# Altium PCB PCB_Drohne.PcbDoc
Units mil, origin at the board's own origin, x right, y up, seen from the top; angles counter-clockwise.
Board outline 5688.98 x 1811.02 mil, 2 copper layers (Top Layer, Bottom Layer); 20 components, 23 nets, 121 pads, 8 vias.
Unrouted connection lines stored in the file: 2.
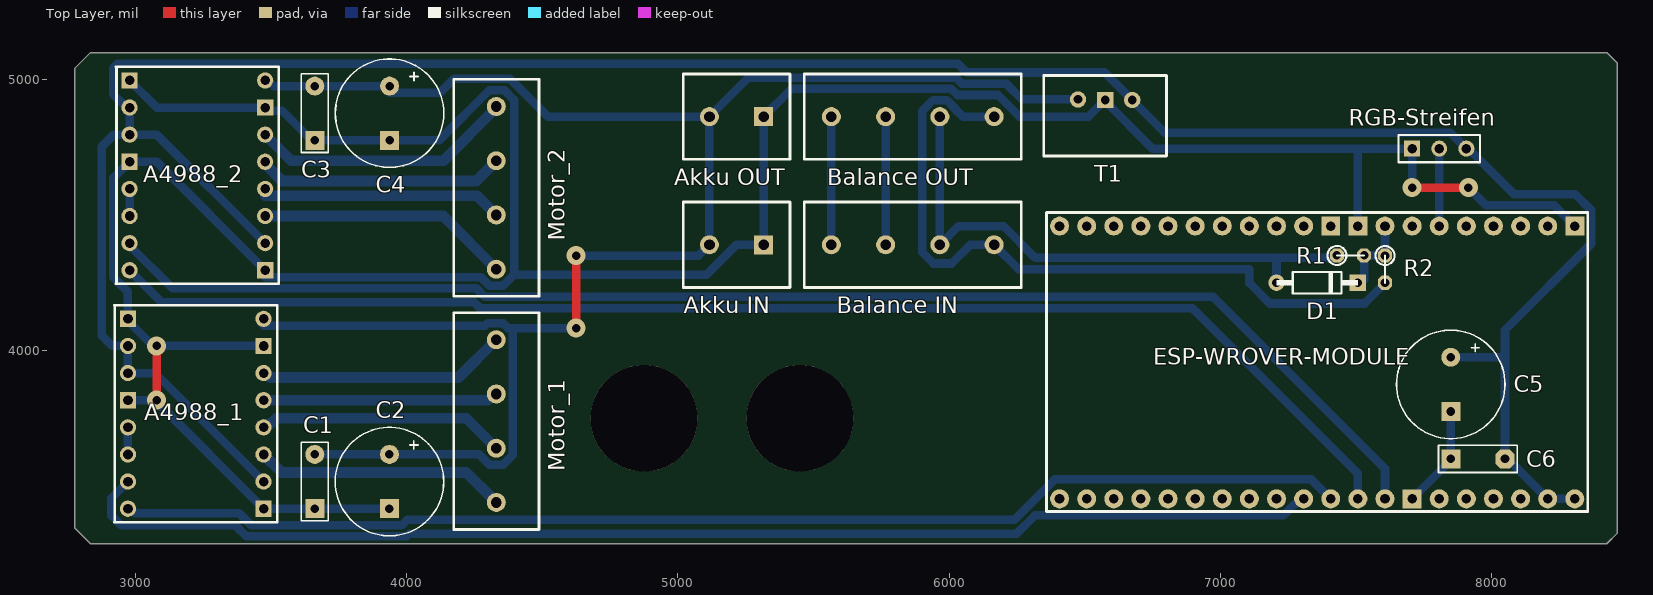
[diagram p0: Top Layer view]
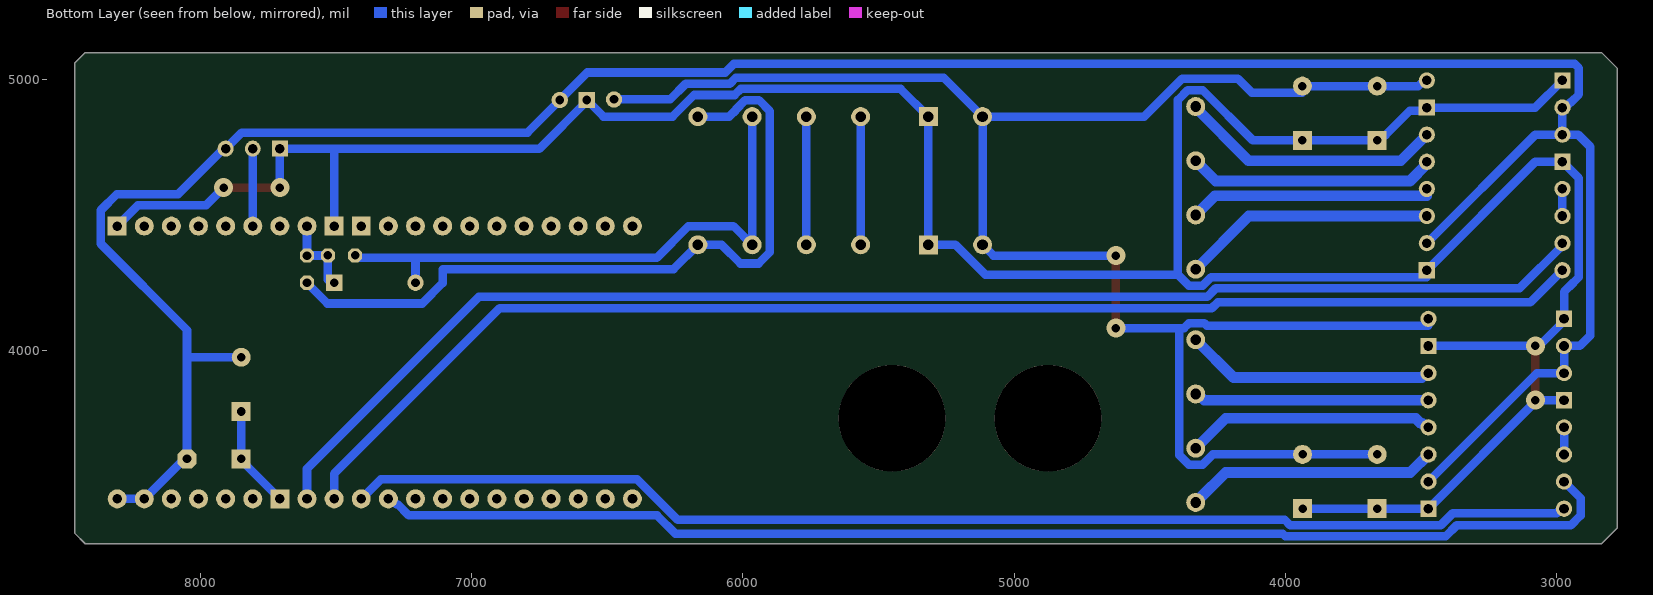
[diagram p1: Bottom Layer view, seen from below]
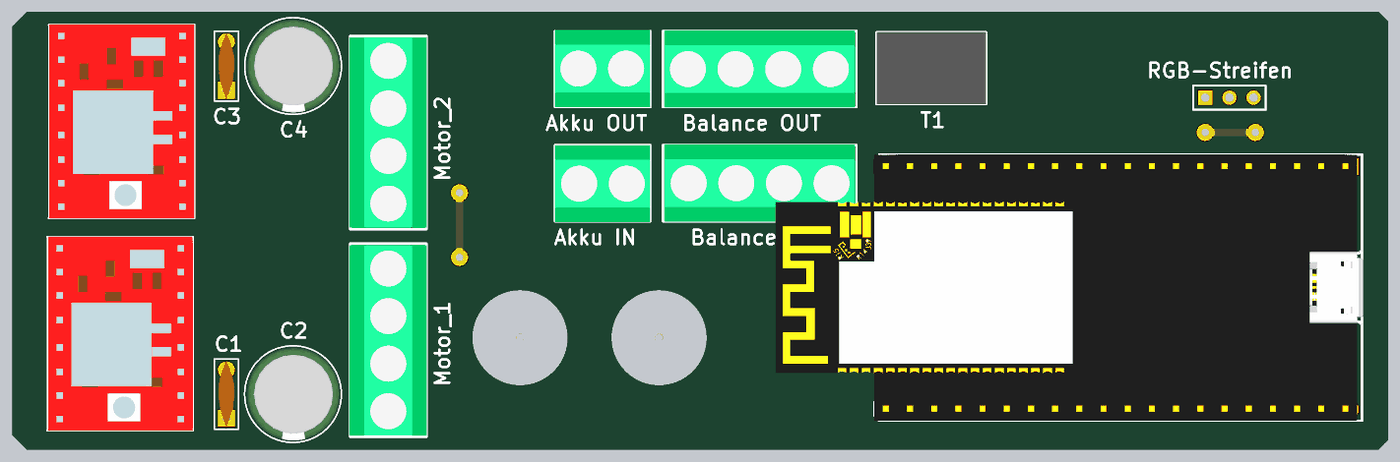
[diagram p2: 3D render of the assembled board from above, using the file's embedded part models]

## Layer stack, top to bottom
Top Solder: solder mask 0.4, Solder Resist, Dk 3.5
Top Layer: signal copper 1.4
Dielectric1: dielectric 12.6, FR-4, Dk 4.8
Bottom Layer: signal copper 1.4
Bottom Solder: solder mask 0.4, Solder Resist, Dk 3.5

## Board outline
2834.65,3287.4 2775.59,3346.46 2775.59,5039.37 2834.65,5098.43 8425.2,5098.43 8464.57,5059.06 8464.57,3326.77 8425.2,3287.4

## Design rules (kind name [scope] priority, off if disabled: settings)
Clearance "Text (Polygon)" [inPolygon vs isText] p1: gap=0 ignorepadtopadclearanceinfootprint=FALSE
Clearance "Masseflaeche (Polygon)" [All vs inPolygon] p2: gap=20 ignorepadtopadclearanceinfootprint=FALSE except(0: Arc-Hole Track-Hole SMDPad-Hole THPad-Hole Via-Hole Fill-Hole Poly-Hole Region-Hole Text-Hole)
Clearance "Abstand (Clearance)" [All] p3: gap=10 ignorepadtopadclearanceinfootprint=FALSE except(0: Arc-Hole Track-Hole SMDPad-Hole THPad-Hole Via-Hole Fill-Hole Poly-Hole Region-Hole Text-Hole)
DiffPairsRouting [All] p1: maxlimit=15 minlimit=12 mostfreqgap=12 toplayer_minwidth=15 toplayer_maxwidth=15 toplayer_prefwidth=15 bottomlayer_minwidth=15 bottomlayer_maxwidth=15 bottomlayer_prefwidth=15 maxuncoupledlength=500
FabricationTestPointUsage TestPointUsage [All] p1: valid=0 allowmultiple=FALSE
FabricationTestpoint Testpoint [All] p1: side=3 testpointundercomponent=TRUE minsize=40 maxsize=100 preferedsize=60 minholesize=0 maxholesize=40 preferedholesize=32 testpointgrid=1 allowsidetop=TRUE allowsidebottom=TRUE usegrid=TRUE gridtolerance=0.01
HoleSize [All] p1: absolutevalues=TRUE maxlimit=100 minlimit=28 maxpercent=80.000 minpercent=20.000
HoleToHoleClearance [All] p1: gap=10 allowstackedmicrovias=FALSE
PlaneConnect [All] p1: planeconnectstyle=Relief reliefexpansion=20 reliefentries=4 reliefconductorwidth=32 reliefairgap=10
PolygonConnect [All] p1: connectstyle=Relief reliefconductorwidth=32 reliefentries=4 polygonreliefangle="90 Angle" airgapwidth=10
RoomDefinition Schematic_Drohne [InComponentClass('Schematic_Drohne')] p1: confinementstyle=ConfineIn formatcopy=TRUE lockcomponents=FALSE outline -200,-200 1800,-200 1800,800 -200,800
RoutingVias [All] p1: holewidth=28 width=50 viastyle="Through Hole" minholewidth=28 minwidth=50 maxholewidth=28 maxwidth=50
SMDEntry [All] p1: side=TRUE corner=TRUE anyangle=FALSE
SilkToSilkClearance [All] p1 off: silktosilkclearance=10
SilkToSolderMaskClearance SilkscreenOverComponentPads [IsPad] p1 off: minsilkscreentomaskgap=10 clearancetoexposedcopper=TRUE
SolderMaskExpansion [All] p1: expansion=4 istentingtop=FALSE
UnRoutedNet [All] p1: checkbadconnections=TRUE
Width [All] p1: maxlimit=200 minlimit=11 preferedwidth=31.5 minimp=50.000000 maximp=50.000000 favimp=50.000000
21 further rules are at their usual default settings.

## Classes and differential pairs
component class Schematic_Drohne: * A4988_1 A4988_2 "Balance IN" "Balance OUT" C1 C2 C3 C4 C5 C6 D1 Motor_1 Motor_2 R1 R2 RGB-Streifen T1

## Components (designator, comment, footprint, x,y, rotation, side; value= is the part's Value field where it differs from the comment)
A4988_1 "Stepper_Driver" A4988 3222.44,3766.54 r0 top
A4988_2 "Stepper_Driver" A4988 3228.35,4645.67 r0 top
"Akku IN" "Schraubklemme" Schraubklemme_1x2#1 5216.53,4389.76 r270 top (schematic designator Akku)
"Akku OUT" "Schraubklemme" Schraubklemme_1x2#2 5216.53,4862.2 r90 top (schematic designator Ladestecker)
"Balance IN" "Schraubklemme 1x4" CTB0502-4 5866.14,4389.76 r270 top
"Balance OUT" "Schraubklemme 1x4" CTB0502-4 5866.14,4862.2 r90 top
C1 "100nF" "C_RM2-025X075 - with Ceramic Disc Capacitor"#1 3661.42,3416.54 r90 top
C2 "100uF" "C_POL_RM2-10,5 x 12.5mm" 3936.71,3616.54 r270 top
C3 "100nF" "C_RM2-025X075 - with Ceramic Disc Capacitor"#1 3661.42,4775 r90 top
C4 "100uF" "C_POL_RM2-10,5 x 12.5mm" 3937.01,4975 r270 top
C5 "100uF" "C_POL_RM2-10,5 x 12.5mm" 7850,3975 r270 top
C6 "100nF" "C_RM2-025X075 - with Ceramic Disc Capacitor"#2 8050,3600 r180 top
D1 "BZX55C3V3" D_DO35-RM3 7207.48,4249.84 r0 top
ESP "ESP_WROVER_DEVKIT" ESP_WROVER_DEVKIT 7479.92,3957.68 r90 top
Motor_1 "Schraubklemme 1x4" CTB0502-4 4330.71,3739.57 r0 top
Motor_2 "Schraubklemme 1x4" CTB0502-4 4330.71,4599.51 r0 top
R1 "5.6K" "R_0204V/RM1 - 1k" 7480.31,4350.39 r0 top
R2 "2.2K" "R_0204V/RM1 - 1k" 7607.48,4299.84 r270 top
RGB-Streifen "" HDR1X3 7707.48,4744.09 r0 top
T1 "TSR_converter" PCBComponent_1 6575.51,4866.46 r0 top

## Footprints (in the part's own frame and the unit in brackets; to place one, negate y for a bottom-side part, rotate by r counter-clockwise, add the part's x,y. Pads: shape width x height; smd on the part's side, far side on the other; paste and mask are expansions set on the pad)
A4988 [mil]
  rect 60x60 hole 35.43: 1(-250,350) 4(-250,50) 10(250,250) 16(250,-350)
  round 60 hole 35.43: 2(-250,250) 3(-250,150) 5(-250,-50) 6(-250,-150) 7(-250,-250) 8(-250,-350) 9(250,350) 11(250,150) 12(250,50) 13(250,-50) 14(250,-150) 15(250,-250)
  round 60 on Top Overlay: Poti(2.36,-250)
  silkscreen extent -300,-400 300,400, body extent -298,-403 300,403, height 618
"C_POL_RM2-10,5 x 12.5mm" [mil] "RM2, diameter 10.5 mm, height 12.5mm"
  round 70 hole 31.5: 1(0,0)
  rect 70x70 hole 31.5: 2(200,0)
  silkscreen extent -100,-200 300,200, body extent -92,-190 292,194, height 491
"C_RM2-025X075 - with Ceramic Disc Capacitor"#1 [mil] "RM2, outline 2.5 x 7.5 mm"
  rect 70x70 hole 31.5: 1(0,0)
  round 70 hole 31.5: 2(200,0)
  silkscreen extent -45,-50 245,50, body extent -37,-33 238,33, height 278
"C_RM2-025X075 - with Ceramic Disc Capacitor"#2 [mil] "RM2, outline 2.5 x 7.5 mm"
  oct 70x70 hole 31.5: 1(0,0)
  rect 70x70 hole 31.5: 2(200,0)
  silkscreen extent -45,-50 245,50, body extent -37,-33 238,33, height 278
CTB0502-4 [mil]
  round 70 hole 39.37 mask+4: 1(0,300) 2(0,100) 3(0,-100) 4(0,-300)
  silkscreen extent -157,-400 157,400, body extent -159,-394 159,394, height 394
D_DO35-RM3 [mil] "DO35-7, diameter 2 mm, horizontal, grid 7.62 mm"
  round 60 hole 31.5: A(0,0)
  rect 60x60 hole 31.5: C(300,0)
  silkscreen extent 0,-40 300,40, body extent -10,-38 310,38, height 77
ESP_WROVER_DEVKIT [mm]
  round 1.778 hole 0.9: 1(-12.825,27.24) 2(-12.825,24.7) 3(-12.825,22.16) 4(-12.825,19.62) 5(-12.825,17.08) 6(-12.825,14.54) 7(-12.825,12) 8(-12.825,9.46) 9(-12.825,6.92) 10(-12.825,4.38) 11(-12.825,1.84) 12(-12.825,-0.7) 13(-12.825,-3.24) 15(-12.825,-8.32) 16(-12.825,-10.86) 17(-12.825,-13.4) 18(-12.825,-15.94) 19(-12.825,-18.48) 20(-12.825,-21.02) 21(12.725,27.24) 22(12.725,24.7) 23(12.725,22.16) 24(12.725,19.62) 25(12.725,17.08) 26(12.725,14.54) 27(12.725,12) 28(12.725,9.46) 29(12.725,6.92) 30(12.725,4.38) 33(12.725,-3.24) 34(12.725,-5.78) 35(12.725,-8.32) 36(12.725,-10.86) 37(12.725,-13.4) 38(12.725,-15.94) 39(12.725,-18.48)
  rect 1.778x1.778 hole 0.9: 14(-12.825,-5.78) 31(12.725,1.84) 32(12.725,-0.7) 40(12.725,-21.02)
  silkscreen extent -14,-22.24 14,28.46, body extent -14.02,-22.35 14.02,39.35, height 17.97
HDR1X3 [mm] "Connector; Header; 3 Position"
  rect 1.5x1.5 hole 0.9: 1(0,0)
  round 1.5 hole 0.9: 2(2.54,0) 3(5.08,0)
  silkscreen extent -1.27,-1.27 6.35,1.27
PCBComponent_1 [mil]
  round 60 hole 31.5: 1(-100,59) 3(100,57.09)
  rect 60x60 hole 31.5: 2(0,57.09)
  round 60 on Top Overlay: ""(-100,-50)
  silkscreen extent -226,-150 226,148, body extent -226,-149 226,149, height 400
"R_0204V/RM1 - 1k" [mil] "type 0204, RM 1, 1k"
  oct 52x52 hole 31.5: 1(-50,0) 2(50,0)
  silkscreen extent -85,-35 50,35, body extent -86,-36 60,36, height 267
Schraubklemme_1x2#1 [mil]
  rect 70x70 hole 39.37 mask+4: 1(0,100)
  round 70 hole 39.37 mask+4: 2(0,-100)
  silkscreen extent -157,-197 157,197, body extent -157,-197 161,197, height 394
Schraubklemme_1x2#2 [mil]
  round 70 hole 39.37 mask+4: 1(0,100)
  rect 70x70 hole 39.37 mask+4: 2(0,-100)
  silkscreen extent -157,-197 157,197, body extent -157,-197 161,197, height 394

## Part data
"Akku IN" "Akku OUT": library part Schraubklemme_1x2
C1 C3 C6: library part C, "Capacitor", Rated Voltage=50V, LatestRevisionDate=07-Sep-2019, Published=21-Feb-2011, Usage="only permitted for non-commercial purposes at HTL I Innsbruck"
C2 C4 C5: library part C_POL, "Polarized Capacitor", Rated Voltage=63V, LatestRevisionDate=07-Sep-2019, Published=21-Feb-2011, Usage="only permitted for non-commercial purposes at HTL I Innsbruck"
D1: "Zener Diode 3.3V, 500mW (Silicon Epitaxial Planar)", LatestRevisionDate=01-Nov-2012, Published=04-Jun-2011, Publisher="Michael Kupfner", SimulationModellSource="Vishay Telefunken Discrete Diode", Usage="only permitted for non-commercial purposes at HTL I Innsbruck"
R1 R2: library part R, "Resistor", LatestRevisionDate=07-Sep-2019, Published=21-Feb-2011, Usage="only permitted for non-commercial purposes at HTL I Innsbruck"
RGB-Streifen: library part "Header 3", "Header, 3-Pin", LatestRevisionDate=17-Jul-2002, LatestRevisionNote="Re-released for DXP Platform.", Publisher="Altium Limited"
T1: library part TSR-0-5-2450

## Free pads (board coordinates)
  round 393.7 hole 393.7 unplated mask+0: Loch(4875,3750) Loch(5450,3750)

## Via types
v1: diameter 70, hole 31.5, Top Layer to Bottom Layer, 8 vias

## Nets (pads, with @x,y where several pads share a name; then routed paths per layer and width w, separated by ;. In a path a pad name is that pad's centre, name@x,y a point inside that pad or via, vN(x,y) a via of type N, cw(c..) or ccw(c..) an arc to the next point about the centre after c; other vN are vias at no path point)
"ESP Pin 2": ESP.35 RGB-Streifen.2 | length 285.4
  Bottom Layer w31.5: ESP.35 RGB-Streifen.2
"ESP Pin 4": D1.C ESP.33 R1.2 R2.1 | length 303.6
  Bottom Layer w31.5: D1.C 7520.06,4249.84 7530.31,4260.09 R1.2 7530.59,4350.12 7607.2,4350.12 R2.1 ESP.33
"ESP Pin 12": A4988_2.7 ESP.13 | length 5089.5
  Bottom Layer w31.5: A4988_2.7 2978.35,4387.6 3136.77,4229.17 4256.45,4229.17 4288.36,4197.26 6974,4197.26 7607.48,3563.78 ESP.13
"ESP Pin 14": A4988_2.8 ESP.12 | length 4932.7
  Bottom Layer w31.5: A4988_2.8 3096.73,4177.28 4249.65,4177.28 4271.17,4155.77 6897.38,4155.77 7507.48,3545.67 ESP.12
"ESP Pin 26": A4988_1.7 ESP.10 | length 4635.4
  Bottom Layer w31.5: A4988_1.7 2911.69,3455.79 2911.69,3391.37 2947.28,3355.79 3368.09,3355.79 3409.59,3314.29 3999.57,3314.29 4010.27,3325 6250,3325 6317.01,3392.01 7232.64,3392.01 7274.14,3433.5 7277.81,3433.5 7297.06,3452.76 ESP.10
"ESP Pin 27": A4988_1.8 ESP.11 | length 4560.2
  Bottom Layer w31.5: A4988_1.8 2982.86,3416.54 2999.4,3400 3382.56,3400 3426.78,3355.79 3982.38,3355.79 4001.59,3375 6240.35,3375 6390.35,3525 7335.24,3525 ESP.11
GND: "Akku IN.1" "Akku OUT.2" A4988_1.1 A4988_1.4 A4988_1.10 A4988_1.16 A4988_2.1 A4988_2.4 A4988_2.10 A4988_2.16 C1.1 C2.2 C3.1 C4.2 C5.2 C6.2 ESP.14 ESP.31 ESP.32 ESP.40 RGB-Streifen.1 T1.2 | length 11812.6
  Top Layer w31.5: v1(3078.35,3816.54) v1(3078.35,4016.54) ; v1(7707.48,4600) v1(7914.94,4600)
  Bottom Layer w31.5: A4988_1.4 v1(3078.35,3816.54) 3078.35,3810.63 A4988_1.16 C1.1 C2.2 ; A4988_2.1 3078.35,4895.67 A4988_2.10 3489.76,4884.25 3540.75,4884.25 3630.75,4794.25 3642.17,4794.25 C3.1 C4.2 4120.29,4775 4305.55,4960.26 4359.76,4960.26 4396.46,4923.56 4396.46,4279.35 ; A4988_1.10 v1(3078.35,4016.54) 3070.98,4023.9 3057.36,4023.9 2972.44,4108.82 A4988_1.1 2972.44,4216.47 2953.99,4234.92 2953.18,4234.92 2917.6,4270.51 2917.6,4634.92 A4988_2.4 3078.35,4695.67 A4988_2.16 ; A4988_2.16@3478.35,4270.67 4273.64,4270.67 4305.55,4238.76 4355.87,4238.76 4396.46,4279.35 ; ESP.32 7507.48,4741.73 7509.84,4744.09 ; ESP.14 7830.75,3576.02 7830.75,3580.75 C6.2 C5.2@7850,3750 ; v1(7707.48,4600) 7707.48,4725.64 7689.03,4744.09 7509.84,4744.09 ; v1(7914.94,4600) 7979.66,4535.28 8230.87,4535.28 ESP.40 ; 4396.46,4279.35 5106.12,4279.35 5216.54,4389.76 5316.53,4389.76 5316.53,4862.2 5418.78,4964.45 6008.49,4964.45 6030.93,4942.01 6180.04,4942.01 6259.84,4862.2 6514.17,4862.2 6573.23,4921.26 6750.39,4744.09 7509.84,4744.09
NetA4988_1_5: A4988_1.5 A4988_1.6 | length 100
  Bottom Layer w31.5: A4988_1.6 A4988_1.5
NetA4988_1_11: A4988_1.11 Motor_1.1 | length 922.9
  Bottom Layer w39.37: A4988_1.11 3480.73,3916.54 3497.26,3900 4191.14,3900 Motor_1.1
NetA4988_1_12: A4988_1.12 Motor_1.2 | length 845.2
  Bottom Layer w39.37: A4988_1.12@3495.01,3816.54 4299.39,3816.54 4322.42,3839.57 Motor_1.2
NetA4988_1_13: A4988_1.13 Motor_1.3 | length 917.9
  Bottom Layer w39.37: A4988_1.13 3480.73,3716.54 3496.04,3731.85 3501.68,3731.85 3519.82,3750 4220.28,3750 Motor_1.3
NetA4988_1_14: A4988_1.14 Motor_1.4 | length 913.9
  Bottom Layer w39.37: A4988_1.14 3538.98,3550 4220.28,3550 Motor_1.4@4318.21,3452.07
NetA4988_2_5: A4988_2.5 A4988_2.6 | length 100
  Bottom Layer w31.5: A4988_2.6 A4988_2.5
NetA4988_2_11: A4988_2.11 Motor_2.1 | length 972.7
  Bottom Layer w39.37: A4988_2.11 3574.02,4700 4135.93,4700 Motor_2.1@4330.71,4894.78
NetA4988_2_12: A4988_2.12 Motor_2.2 | length 917.1
  Bottom Layer w39.37: A4988_2.12 3478.35,4687.38 3540.73,4625 4256.78,4625 Motor_2.2@4330.71,4698.93
NetA4988_2_13: A4988_2.13 Motor_2.3 | length 881.8
  Bottom Layer w39.37: A4988_2.13@3478.35,4570.67 4259.55,4570.67 Motor_2.3
NetA4988_2_14: A4988_2.14 Motor_2.4 | length 933.6
  Bottom Layer w39.37: A4988_2.14 4134.55,4495.67 Motor_2.4
"NetBalance IN_1": "Balance IN.1" "Balance OUT.4" R2.2 | length 2733.9
  Bottom Layer w31.5: 6166.14,4862.2 6050.34,4862.2 6026.89,4885.65 6026.89,4887.37 5991.3,4922.95 5940.98,4922.95 5900.39,4882.37 5900.39,4362.53 5942.21,4320.71 6009.56,4320.71 6078.61,4389.76 6166.14,4389.76 6256.06,4299.84 7107.48,4299.84 7107.48,4248.43 7182.68,4173.23 7532.28,4173.23 7607.48,4248.43 R2.2
"NetBalance IN_2": "Balance IN.2" "Balance OUT.3" D1.A R1.1 | length 2105.2
  Bottom Layer w31.5: 5966.14,4862.2 5966.14,4389.76 6035.04,4458.66 6200.79,4458.66 6318.11,4341.34 7207.48,4341.34 ; D1.A 7207.48,4341.34 ; R1.1@7430.31,4341.34 7207.48,4341.34
"NetBalance IN_3": "Balance IN.3" "Balance OUT.2" | length 472.4
  Bottom Layer w31.5: 5766.14,4389.76 5766.14,4862.2
"NetBalance IN_4": "Balance IN.4" "Balance OUT.1" | length 472.4
  Bottom Layer w31.5: 5566.14,4389.76 5566.14,4862.2
"VCC 5V": A4988_1.2 A4988_1.3 A4988_1.15 A4988_2.2 A4988_2.3 A4988_2.15 C5.1 C6.1 ESP.19 ESP.20 RGB-Streifen.3 T1.3 | length 9862.6
  Bottom Layer w31.5: A4988_1.15 3072.44,3916.54 A4988_1.3 A4988_1.2 2914.44,4016.54 2876.1,4054.87 2876.1,4751.43 2920.35,4795.67 A4988_2.3 ; A4988_2.15 3078.35,4795.67 A4988_2.3 ; T1.3@6670.81,4926.85 6794.51,4803.15 7848.43,4803.15 RGB-Streifen.3 7914.94,4744.09 8082.26,4576.77 8308.28,4576.77 8368.23,4516.83 8368.23,4393.23 8050,4075 8050,3975 ; T1.3 6574.05,5025 6065.31,5025 6033.89,5056.42 2932.68,5056.42 2917.6,5041.33 2917.6,4944.12 2946.8,4914.92 2948.68,4914.92 2967.93,4895.67 A4988_2.2 A4988_2.3 ; C5.1 8050,3975 ; C6.1 8050,3975 ; C6.1@8074.02,3586.22 ESP.19 ESP.20
"VCC 11.1V": "Akku IN.2" "Akku OUT.1" A4988_1.9 A4988_2.9 C1.2 C2.1 C3.2 C4.1 T1.1 | length 6817.9
  Top Layer w31.5: v1(4625,4082.48) v1(4625,4350)
  Bottom Layer w31.5: A4988_1.9@3472.44,4091.54 4289.7,4091.54 4298.48,4100.31 4355.87,4100.31 4373.71,4082.48 4391.46,4082.48 ; A4988_2.9 3488.77,4995.67 3509.43,4975 C3.2 C4.1 ; C1.2 C2.1 4267.83,3616.54 4305.55,3578.82 4355.87,3578.82 4391.46,3614.4 4391.46,4082.48 ; C4.1@3937.01,4950 4123.42,4950 4175.17,5001.75 4380.95,5001.75 4520.5,4862.2 5116.53,4862.2 ; v1(4625,4082.48) 4391.46,4082.48 ; v1(4625,4350) 5076.77,4350 5116.53,4389.76 5116.53,4862.2 ; T1.1 6269.09,4925.46 6211.04,4983.5 6048.12,4983.5 6025.68,5005.94 5260.27,5005.94 5116.53,4862.2
pads on no net: A4988_1.Poti A4988_2.Poti ESP.1 ESP.2 ESP.3 ESP.4 ESP.5 ESP.6 ESP.7 ESP.8 ESP.9 ESP.15 ESP.16 ESP.17 ESP.18 ESP.21 ESP.22 ESP.23 ESP.24 ESP.25 ESP.26 ESP.27 ESP.28 ESP.29 ESP.30 ESP.34 ESP.36 ESP.37 ESP.38 ESP.39 T1.
copper on no net:
  other v1: 4875,3750 5450,3750

## Other copper
Top Layer:
  text "LAYOUT TOP" at 10300,880 h70
  text "2" at 10300,280 h70
Bottom Layer:
  text "LAYOUT BOTTOM" at 10300,880 h70
  text "3" at 10300,280 h70

## Silkscreen, mask and mechanical layers (free items; w line width, h text height)
Top Overlay:
  text "BESTUECK. TOP" at 10300,880 h70
  text "4" at 10300,280 h70
Bottom Overlay:
  text "BESTUECK. BOTTOM" at 10300,880 h70
  text "5" at 10300,280 h70
Mechanical 4 (Printumriss):
  the board outline again, w10
Mechanical 16 (Blatt-Beschriftung):
  drawing of 349 lines, arcs and shapes, not listed
  text "1" at 1427,7465 h70
  text "2" at 4287,7465 h70
  text "3" at 7167,7465 h70
  text "4" at 10037,7465 h70
  text "A" at 75,6559 h70
  text "A" at 11375,6559 h70
  text "B" at 75,4667 h70
  text "C" at 75,2757 h70
  text "C" at 2910.43,2520.78 h70
  text "TITEL:" at 6850,1300 h45
  text "PROJEKTNAME" at 6900,1180 h70
  text "NAME:" at 6850,1000 h45
  text "GRUPPE:" at 8350,1000 h45
  text "KLASSE:" at 9180,1000 h45
  text "DOKUMENTENART:" at 10250,1000 h45
  text "MAX MUSTERMANN" at 6900,880 h70
  text "I" at 8400,880 h70
  text "KLASSE" at 9230,880 h70
  text "D" at 75,867 h70
  text "D" at 11375,867 h70
  text "DATUM:" at 6850,700 h45
  text "REVISION:" at 8350,700 h45
  text "MASZSTAB:" at 9180,700 h45
  text "DOKUMENTENSTATUS:" at 10250,700 h45
  text "HTBLVA" at 5550,600 h70
  text ".PRINT_DATE" at 6900,580 h70
  text "0.1" at 8400,580 h70
  text ".Print_Scale" at 9230,580 h70
  text "ENTWURF" at 10300,580 h70
  text "Abt. Elektronik" at 5550,500 h70
  text "Anichstrasse 26-28" at 5550,400 h70
  text "SACHNUMMER/DATEINAME:" at 6850,400 h45
  text "BLATT:" at 10250,400 h45
  text "BLAETTER:" at 10800,400 h45
  text "A-6020 Innsbruck" at 5550,300 h70
  text ".PCB_FILE_NAME_NO_PATH" at 6900,280 h70
  text "6" at 10850,280 h70
  text "1" at 1427,65 h70
  text "2" at 4287,65 h70
  text "3" at 7167,65 h70
  text "4" at 10037,65 h70
Drill Drawing:
  text ".LEGEND" at 4700,1800 h60
  text "BOHRPLAN" at 10300,880 h70
  text "6" at 10300,280 h70

## Dimensions
8425.2,3287.4 to 8425.2,5098.43 on Mechanical 3 (Bemassungen)
8464.57,3326.77 to 2775.59,3346.46 on Mechanical 3 (Bemassungen)

## Text inside footprints (layer, text, board x,y; h text height)
ESP: Top Overlay "ESP-WROVER-MODULE" at 6752.13,3947.01 h60